# Altium PCB DE-020717.PcbDoc (part 2 of 3)
Units mil, origin at the board's own origin, x right, y up, seen from the top; angles counter-clockwise.
Board outline 2598.43 x 2598.43 mil, 4 copper layers (Top Layer, Power, Ground, Bottom Layer), stack 30.668 mil thick; 178 components, 180 nets, 707 pads, 289 vias.
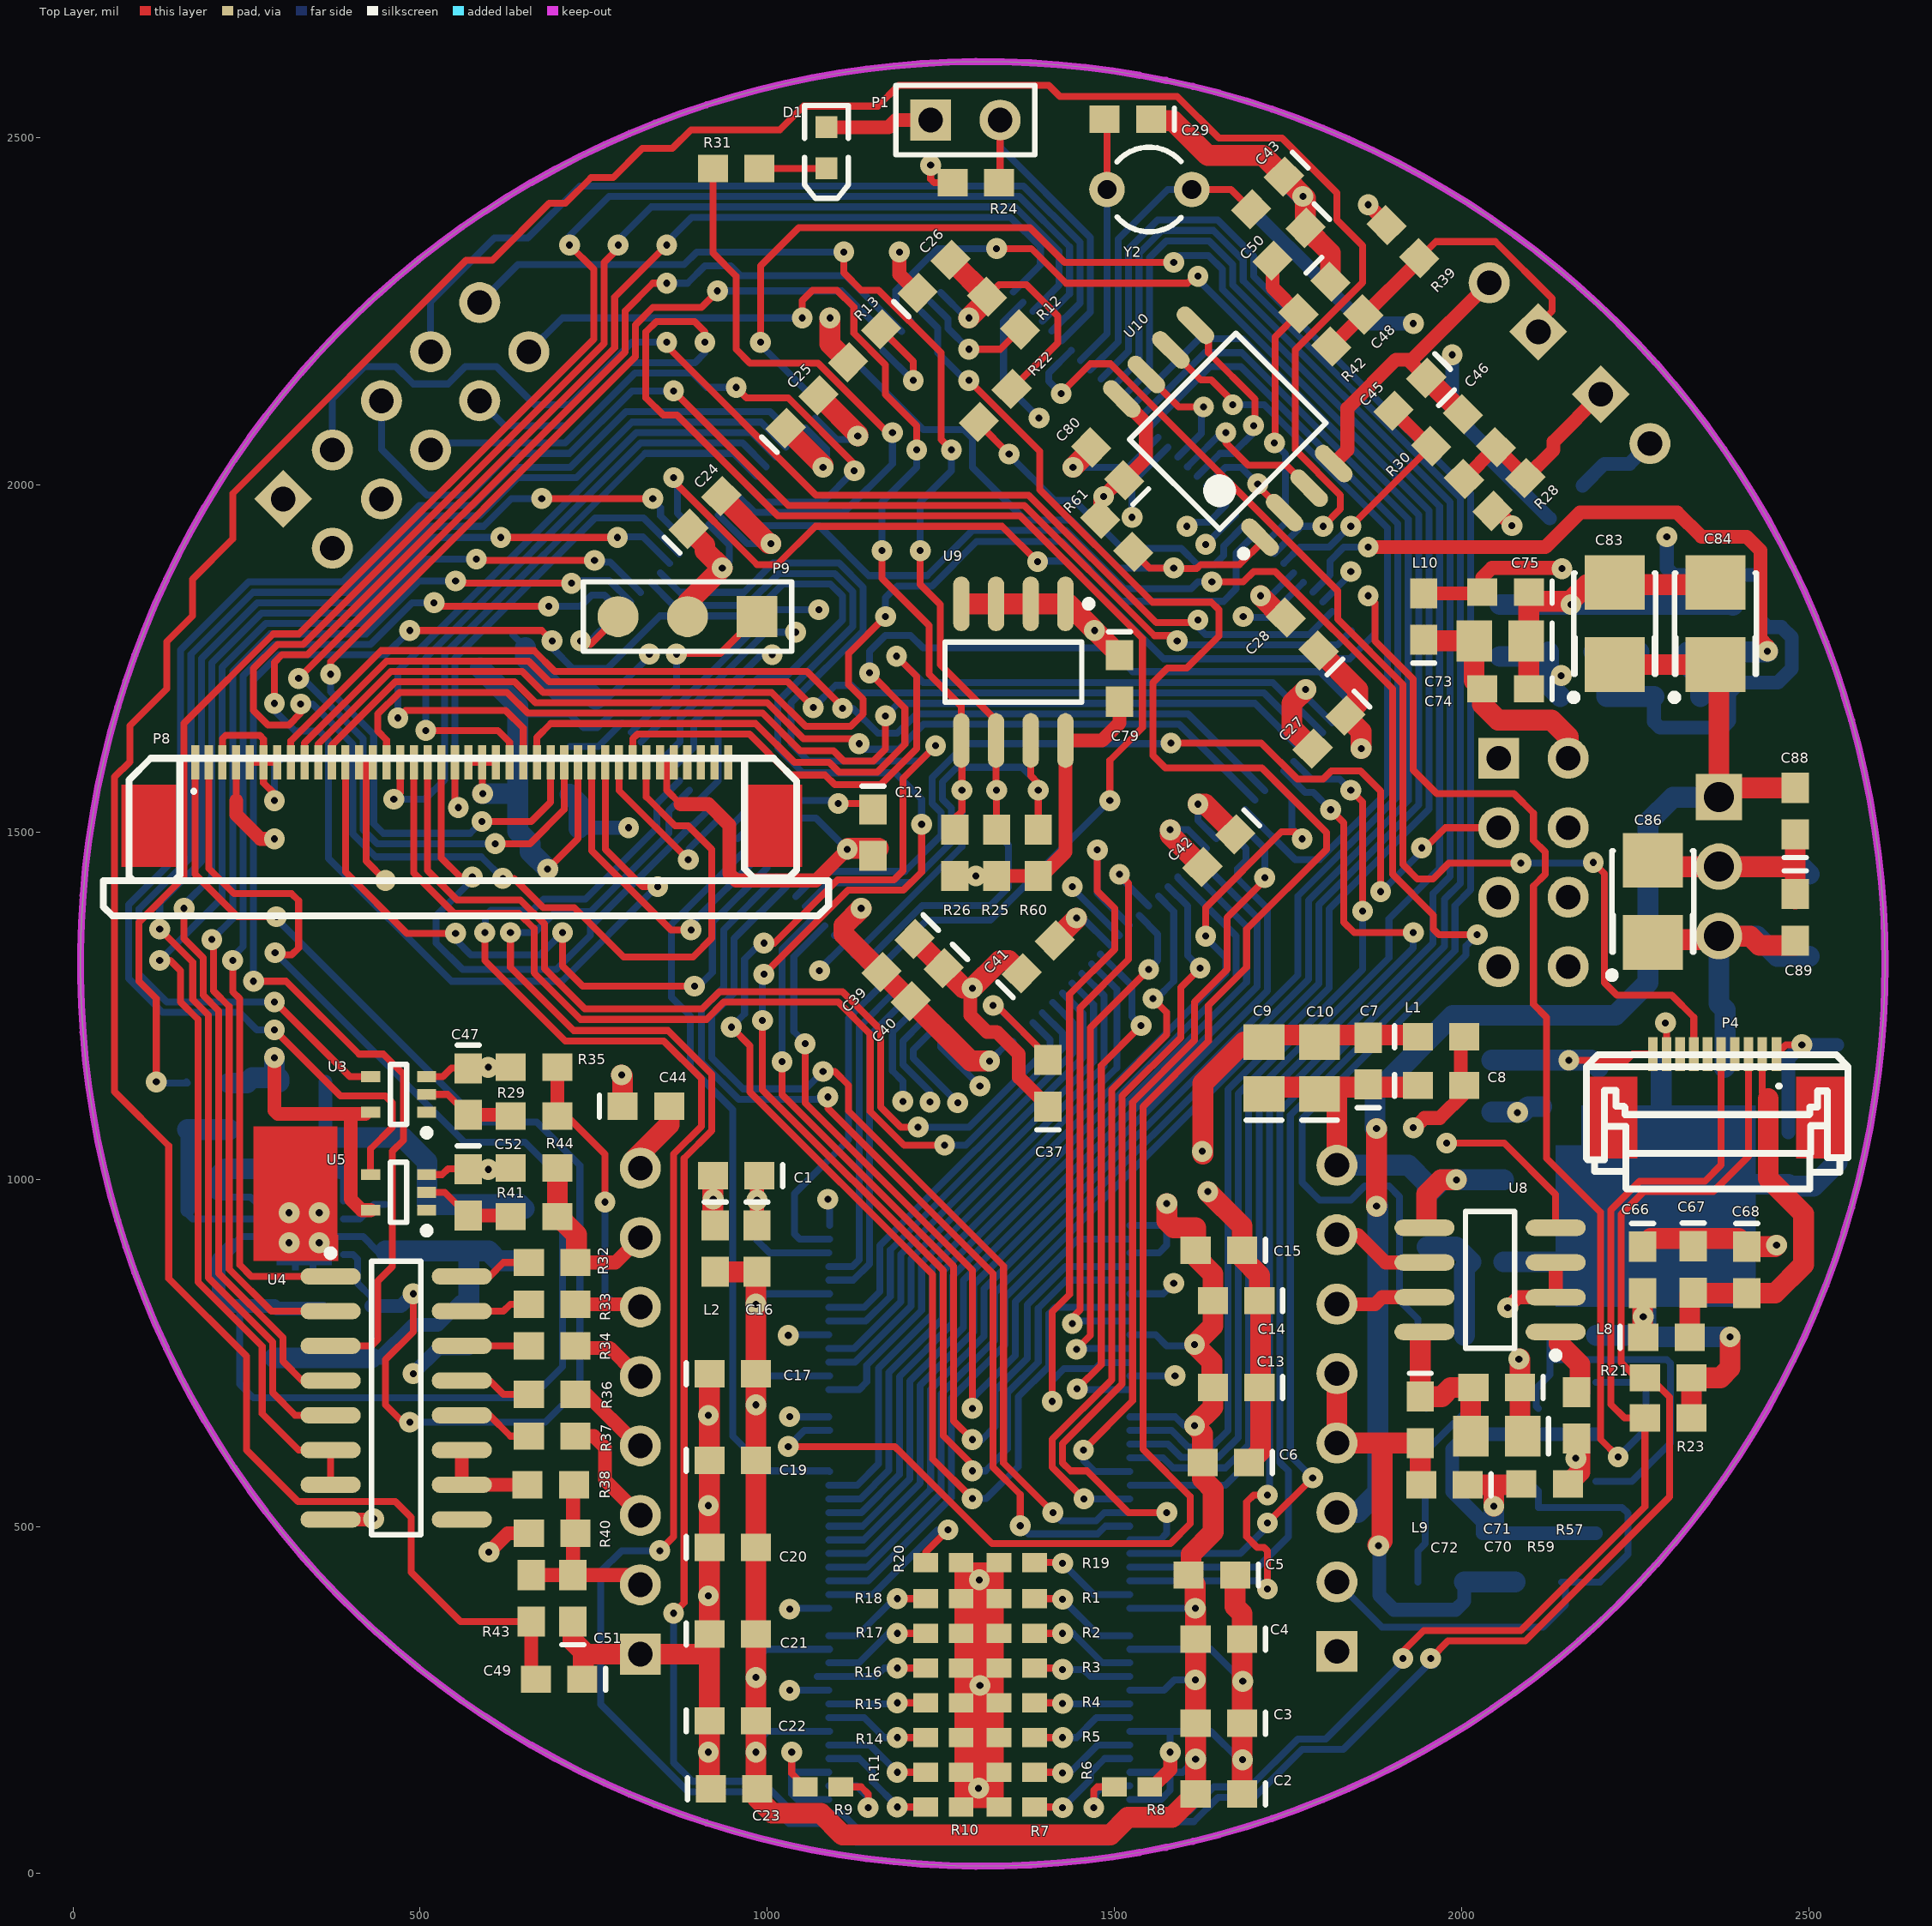
[diagram p0: Top Layer view]

## Via types
v1: diameter 30, hole 10, Top Layer to Bottom Layer, 289 vias

## Nets (pads, with @x,y where several pads share a name; then routed paths per layer and width w, separated by ;. In a path a pad name is that pad's centre, name@x,y a point inside that pad or via, vN(x,y) a via of type N, cw(c..) or ccw(c..) an arc to the next point about the centre after c; other vN are vias at no path point) (continued)
FMC_D0: (continued)
  Bottom Layer w10: v1(1054.25,1195) 1055,1195.75 1038,1212.75 1038,1320.46 U1.85@1082.5,1364.97 ; v1(1295,670) 1295.96,670.96 1295.96,684.96 1357,746 1357,823.43 1447.27,913.7 U2.2@1522.54,913.7
FMC_D1: U1.86 U2.4 | length 1293.6
  Top Layer w10: v1(1021,1169) 1021,1121.69 1268,874.69 1268,652 v1(1295,625)
  Bottom Layer w10: v1(1021,1169) 1021,1331.3 U1.86@1068.59,1378.89 ; v1(1295,625) 1309,625 1328,644 1328,695.79 1374.21,741.99 1374.21,819.42 1429.12,874.33 U2.4@1522.54,874.33
FMC_D2: U1.114 U2.5 | length 2509.6
  Top Layer w10: v1(992.89,1228.5) 992.89,1128.58 1253,868.48 1253,630.59 1295,588.59 v1(1295,580) ; v1(995,1295) 1116,1416 1196,1416 1222,1442 v1(1222,1511)
  Bottom Layer w10: U1.114@831.96,1859.11 865.06,1826 970,1826 1016,1872 1096.79,1872 1123,1845.79 1123,1796 1015,1688 1015,1621 1051,1585 1184,1585 1222,1547 v1(1222,1511) ; v1(992.89,1228.5) 992.89,1292.89 v1(995,1295) ; v1(1295,580) 1314,580 1346,612 1346,692.57 1390,736.57 1390,814 1430.65,854.65 U2.5@1522.54,854.65
FMC_D3: U1.115 U2.7 | length 2679.5
  Top Layer w10: v1(948,1219) 975,1192 975,1125.26 1238,862.26 1238,597 v1(1295,540) ; v1(995,1340) 1010,1340 1101,1431 1182,1431 1195,1444 1195,1577 v1(1242,1624)
  Bottom Layer w10: U1.115@845.87,1873.03 873.9,1845 966,1845 1008,1887 1103,1887 1138,1852 1138,1789.79 1034,1685.79 1034,1627 1059,1602 1220,1602 v1(1242,1624) ; v1(948,1219) 967,1238 967,1317 v1@990,1340 ; v1(1295,540) 1315,540 1361,586 1361,686.36 1405,730.36 1405,806 1414.28,815.28 U2.7@1522.54,815.28
FMC_D4: U1.58 U2.8 | length 833.9
  Top Layer w10: v1(1439,792) 1439,801 1450,812 1450,1246.48 1520,1316.48 1520,1426 v1(1507,1439)
  Bottom Layer w10: v1(1439,792) 1442.59,795.59 U2.8@1522.54,795.59 ; v1(1507,1439) 1507,1435.56 U1.58@1549.07,1393.49
FMC_D5: U1.59 U2.10 | length 772.1
  Top Layer w10: v1(1445,755) 1465,775 1465,1218 v1(1549,1302)
  Bottom Layer w10: v1(1445,755) 1445,763.44 1452.22,756.22 U2.10@1521.54,756.22 ; U1.59@1535.15,1379.57 1562,1352.73 1562,1315 v1(1549,1302)
FMC_D6: U1.60 U2.11 | length 1120.9
  Top Layer w10: v1(1410,680) 1410,809 1435,834 1435,1266.21 1500,1331.21 1500,1390 1475,1415 v1(1475,1474)
  Bottom Layer w10: v1(1410,680) 1410,710 1427,727 1472,727 1481,736 U2.11@1521,736 ; v1(1475,1474) 1475,1411.89 U1.60@1521.23,1365.66
FMC_D7: U1.63 U2.13 | length 764.1
  Top Layer w10: v1(1446,698) 1480.75,732.75 1480.75,1163.75 v1(1538,1221)
  Bottom Layer w10: v1(1446,698) 1446.83,697.17 U2.13@1521.54,697.17 ; U1.63@1479.47,1323.9 1525,1278.37 1525,1234 v1(1538,1221)
FMC_D8: U1.64 U2.74 | length 825.2
  Bottom Layer w10: U2.74@1088.46,697.17 1132.17,697.17 1143,708 1143,732.15 1222,811.15 1222,879.35 1503,1160.35 1503,1273.58 U1.64@1466.58,1310
FMC_D9: U1.65 U2.76 | length 759
  Bottom Layer w10: U2.76@1088.46,736.54 1126.18,736.54 1207,817.36 1207,885.56 1484.62,1163.18 1484.62,1264.12 U1.65@1452.66,1296.08
FMC_D10: U1.66 U2.77 | length 717.8
  Bottom Layer w10: U2.77@1088.46,756.22 1124.65,756.22 1192,823.57 1192,891.77 1469.62,1169.39 1469.62,1251.28 U1.66@1438.74,1282.16
FMC_D11: U1.67 U2.79 | length 667.8
  Bottom Layer w10: U2.79@1088.46,795.59 1141.59,795.59 1177,831 1177,897.98 1454.62,1175.6 1454.62,1238.44 U1.67@1424.82,1268.24
FMC_D12: U1.68 U2.80 | length 626.2
  Bottom Layer w10: U2.80@1088.46,815.28 1139.28,815.28 1162,838 1162,904.2 1439.62,1181.82 1439.62,1225.6 U1.68@1410.9,1254.32
FMC_D13: U1.77 U2.82 | length 467.3
  Bottom Layer w10: U2.82@1088.46,854.65 1123.65,854.65 1147,878 1147,1206.18 U1.77@1197.12,1256.3
FMC_D14: U1.78 U2.83 | length 454.8
  Bottom Layer w10: U2.83@1088.46,874.33 1122.12,874.33 1132,884.21 1132,1219.01 U1.78@1183.2,1270.22
FMC_D15: U1.79 U2.85 | length 470.6
  Bottom Layer w10: U2.85@1089.46,913.7 1046.3,913.7 1039,921 1039,979 1117,1057 1117,1231.85 U1.79@1169.29,1284.14
FMC_NBL0: U1.141 U2.16 | length 2623.2
  Top Layer w10: v1(1330,2340) 1380,2340 1430,2290 1605,2290 1615,2300 v1(1620,2300)
  Bottom Layer w10: U1.141@1207.04,2234.62 1185,2256.66 1185,2280 1245,2340 v1(1330,2340) ; U2.16@1521.54,638.11 1581.89,638.11 1605.75,614.25 1639.25,614.25 1663,638 1663,1129.28 1809,1275.28 1809,1389.15 1952.75,1532.9 1952.75,1962.4 1625,2290.15 1625,2300 v1(1620,2300)
FMC_NBL1: U1.142 U2.71 | length 3071.3
  Top Layer w10: v1(1030,615) 1183.59,615 1193.59,605 1269.25,529.33 1323.33,475.25 1580.25,475.25 1609,504 1609,543 1540.75,611.25 1540.75,1104.53 1635,1198.79 1635,1250 1690,1305 1690,1360 1805,1475 1805,1499 1712,1592 1573,1592 1555,1610 1555,1715 1576,1736 1604,1736 1650,1782 1650,1820 1639.25,1830.75 1554.25,1830.75 1392,1993 1392,2048 v1(1290,2150)
  Bottom Layer w10: v1(1030,615) 1053.11,638.11 U2.71@1089.46,638.11 ; U1.142@1221.7,2248.85 1245,2225.55 1245,2190 1285,2150 v1(1290,2150)
FMC_SDCKE0: U1.45 U2.67 | length 1392.6
  Top Layer w10: v1(1631,1350) 1631,1391 1740,1500 1760,1500 v1(1770,1490)
  Bottom Layer w10: U2.67@1088.46,559.37 1129.37,559.37 1160,590 1160,727.93 1237,804.93 1237,873.13 1660,1296.13 1660,1319 1631,1348 v1(1631,1350) ; U1.45@1730.02,1573.45 1755,1548.47 1755,1505 v1(1770,1490)
FMC_SDCLK: U1.93 U2.68 | length 1088.6
  Bottom Layer w10: U1.93@971.15,1476.32 862,1367.17 862,1262 889,1235 889,1161 950,1100 950,630 1000,580 1088.52,580 U2.68@1089.46,579.06
FMC_SDNCAS: U1.132 U2.18 | length 3092.3
  Top Layer w10: v1(990,2205) 990,2315 1045,2370 1378,2370 1428,2320 v1(1585,2320)
  Bottom Layer w10: v1(990,2205) 990,2201.11 U1.132@1081.77,2109.34 ; U2.18@1521.54,598.74 1569.62,598.74 1584.11,584.25 1659.25,584.25 1693,618 1693,1116.85 1895,1318.85 1895,1375 1967.75,1447.75 1967.75,1968.61 1655,2281.36 1655,2310 1635,2330 1593.5,2330 1585,2321.5 v1(1585,2320)
FMC_SDNE0: U1.44 U2.20 | length 1419.4
  Top Layer w10: v1(1811,1532) 1830,1513 1830,1370 1845,1355 v1(1930,1355)
  Bottom Layer w10: U2.20@1522.54,559.37 1659.37,559.37 1708,608 1708,1110.64 1930,1332.64 v1(1930,1355) ; U1.44@1743.68,1587.68 1774.36,1557 1786,1557 v1(1811,1532) 1810.69,1532 v1@1805,1526.31
FMC_SDNRAS: U1.49 U2.19 | length 1121.3
  Top Layer w10: v1(1455,610) 1525.75,680.75 1525.75,1110.75 1615,1200 1615,1255 1661.75,1301.75 1661.75,1376.75 1716,1431 v1(1716,1434)
  Bottom Layer w10: v1(1455,610) 1455,595 1470.94,579.06 U2.19@1521.54,579.06 ; U1.49@1674.34,1517.77 1716.06,1476.06 1716.06,1434.06 v1(1716,1434)
FMC_SDNWE: U1.43 U2.17 | length 1288.7
  Top Layer w10: v1(1840,1560) 1857,1543 v1(1857,1386)
  Bottom Layer w10: U2.17@1521.54,618.43 1576.57,618.43 1595.75,599.25 1649.25,599.25 1678,628 1678,1123.07 1857,1302.07 v1(1857,1386) ; U1.43@1757.86,1601.29 1783.15,1576 1824,1576 v1(1840,1560)
HEATING_VL: U1.118 U4.5 | length 2061.1
  Top Layer w10: v1(125,1360) 172.5,1312.5 172.5,1258.71 195,1236.21 195,858.21 287.5,765.71 287.5,692.5 320,660 U4.5@371.02,660 ; v1(675,1980) v1(835,1980)
  Bottom Layer w10: v1(125,1360) 125,1397.57 185,1457.57 185,1749.57 265.43,1830 403.43,1830 513.43,1940 591.21,1940 631.21,1980 v1(675,1980) ; 846,1967 846,1955.37 U1.118@886.9,1914.47
I2C3_SCL: P4.3 R21.2 U1.100 | length 4461.6
  Top Layer w10: v1(593,1355) 593,1315 709,1199 850.79,1199 905,1144.79 905,1076.21 865,1036.21 865,485 v1(845,465) ; v1(1955,310) 1980,335 2091.21,335 2298.81,542.6 2298.81,686.19 2271,714 R21.2@2263.54,714 2251,714 2229.37,735.63 2229.37,949.37 2262,982 2362,982 2412.63,1032.63 P4.3@2412.63,1180
  Bottom Layer w10: v1(593,1355) 594,1356 594,1379 602,1387 662,1387 678,1403 738,1403 841,1506 841,1541.04 U1.100@873.71,1573.76 ; v1(845,465) 790,465 760,435 760,243.79 885.79,118 985,118 1031,72 1101,72 1128,45 1491,45 1521,75 1614,75 1649,110 1701,110 1770,179 1829,179 1950,300 v1@1960,300